# Altium PCB POEInjector.PcbDoc
Units mil, origin at the board's own origin, x right, y up, seen from the top; angles counter-clockwise.
Board outline 5250 x 2100 mil, 4 copper layers (Top Layer, GND Plane, 24V Plane, Bottom Layer), stack 30.634 mil thick; 59 components, 70 nets, 289 pads, 19 vias.
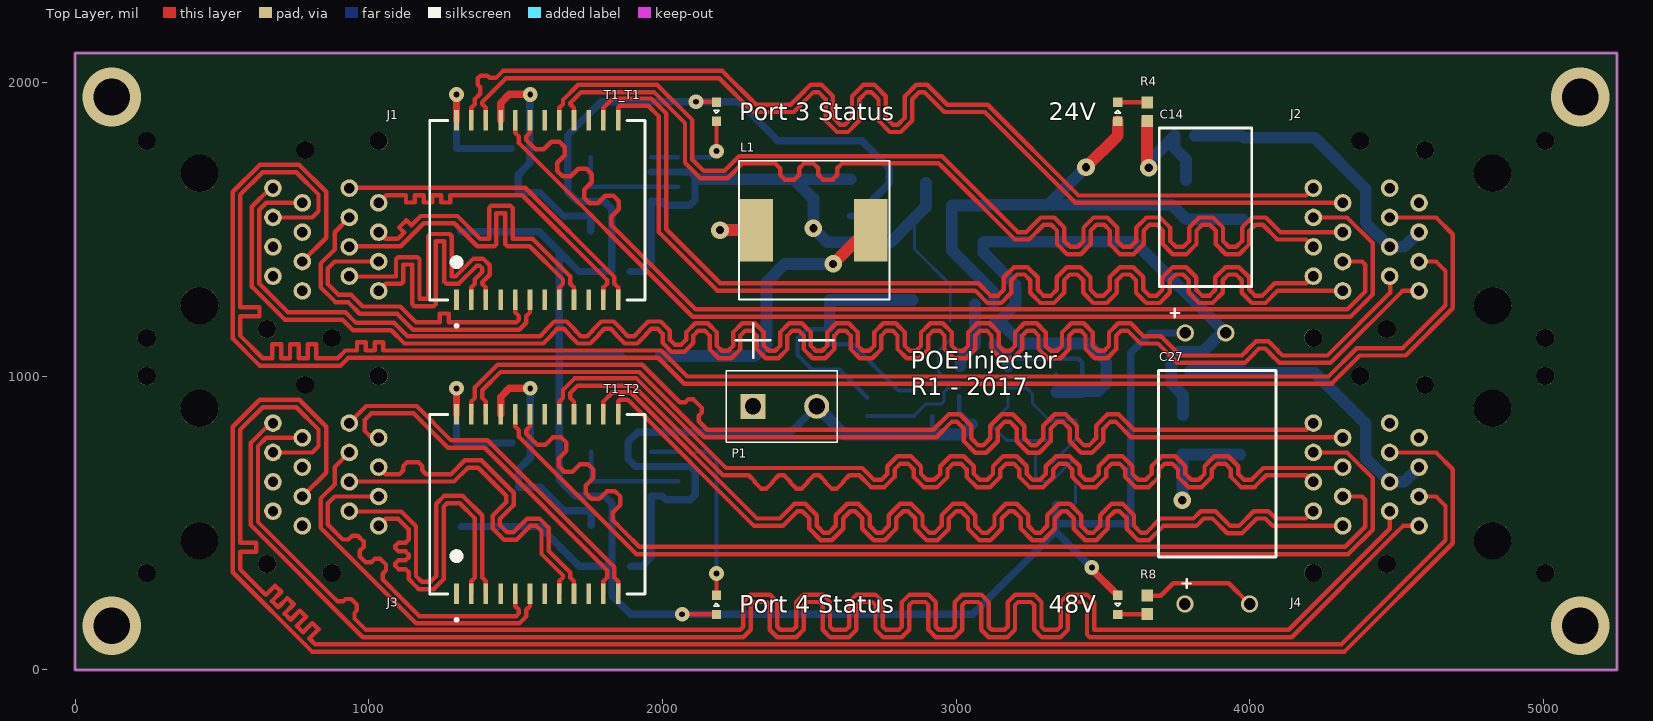
[diagram p0: Top Layer view]
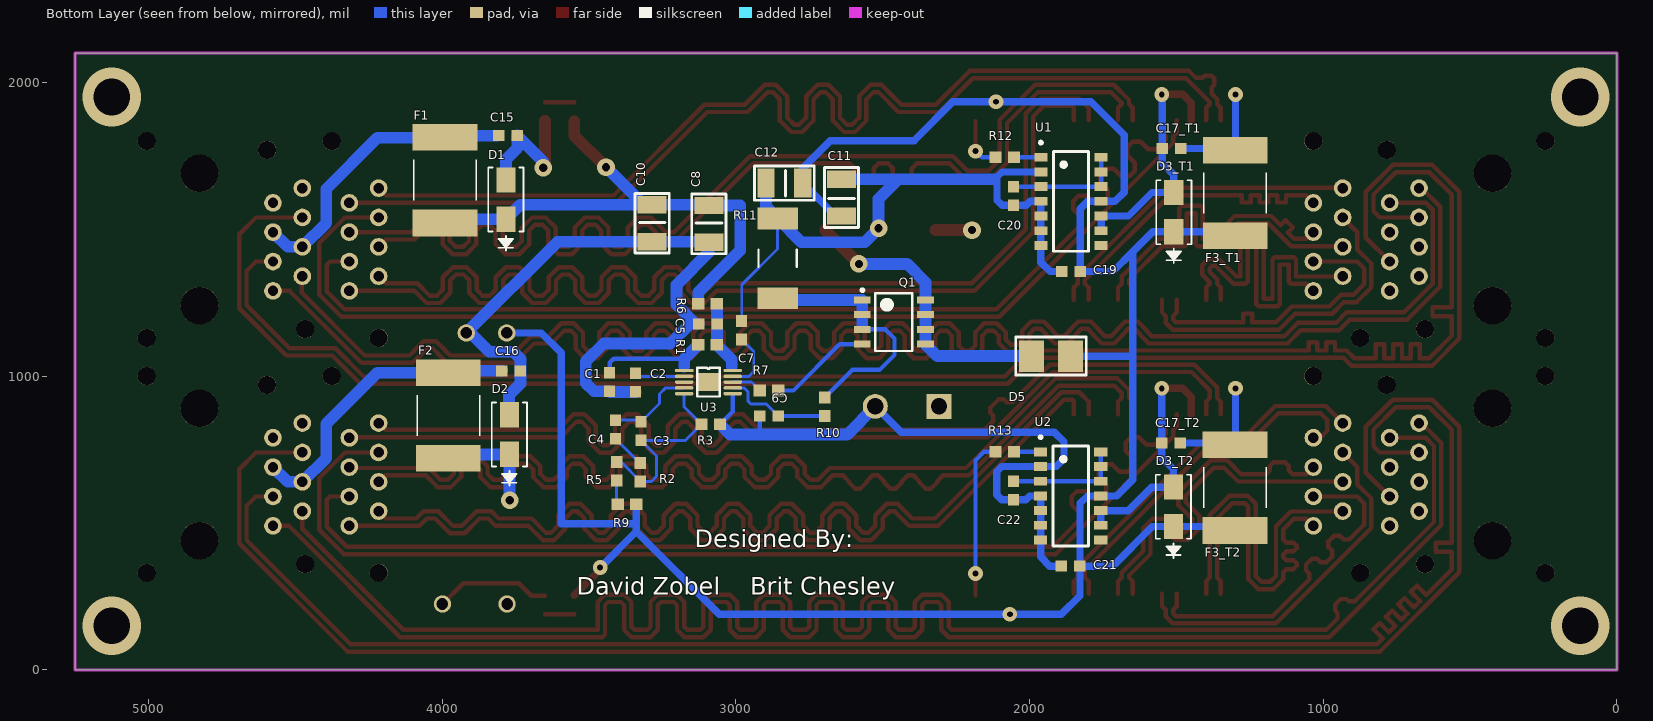
[diagram p1: Bottom Layer view, seen from below]
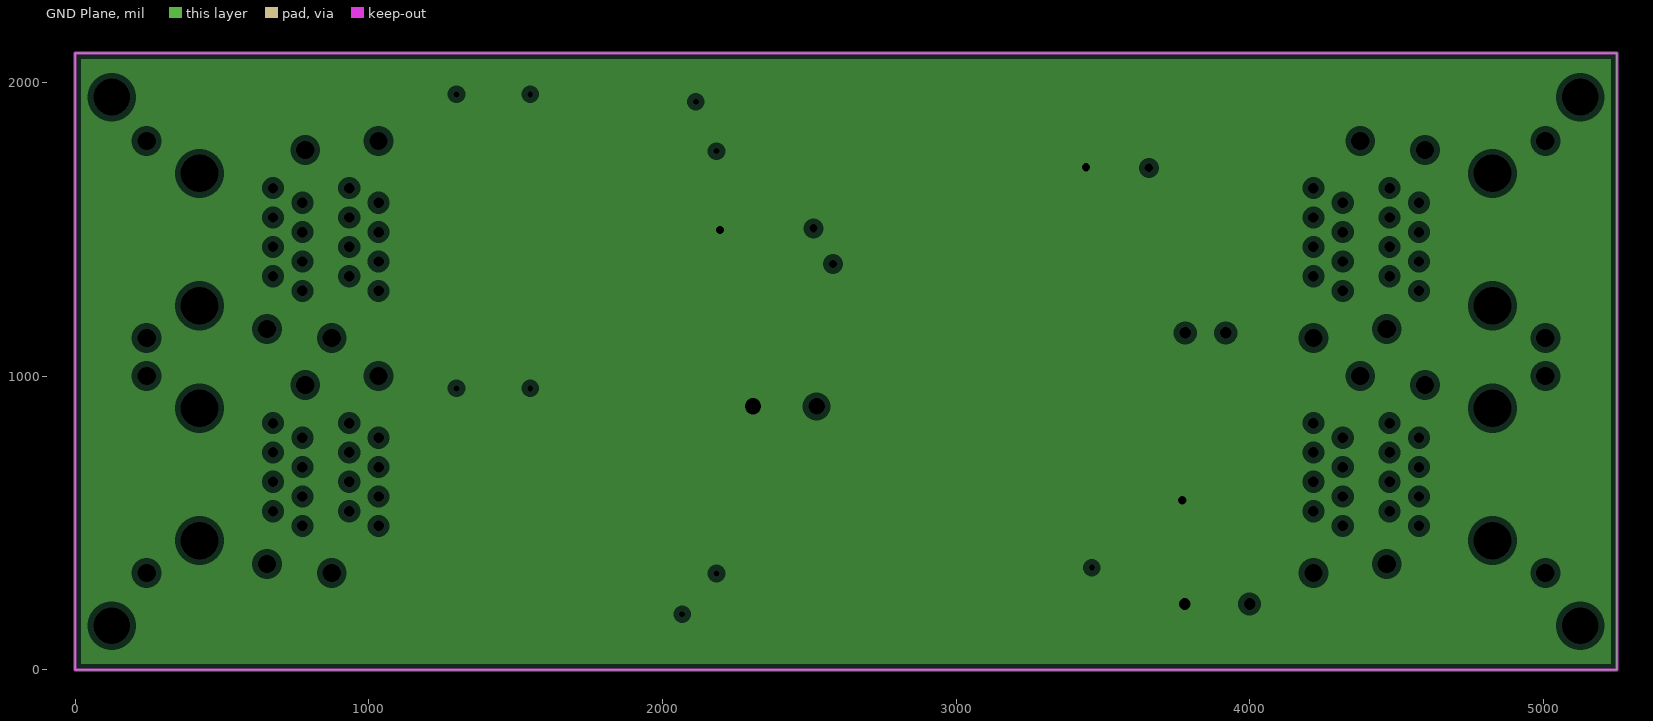
[diagram p2: GND Plane, clearances drawn from the general rule]
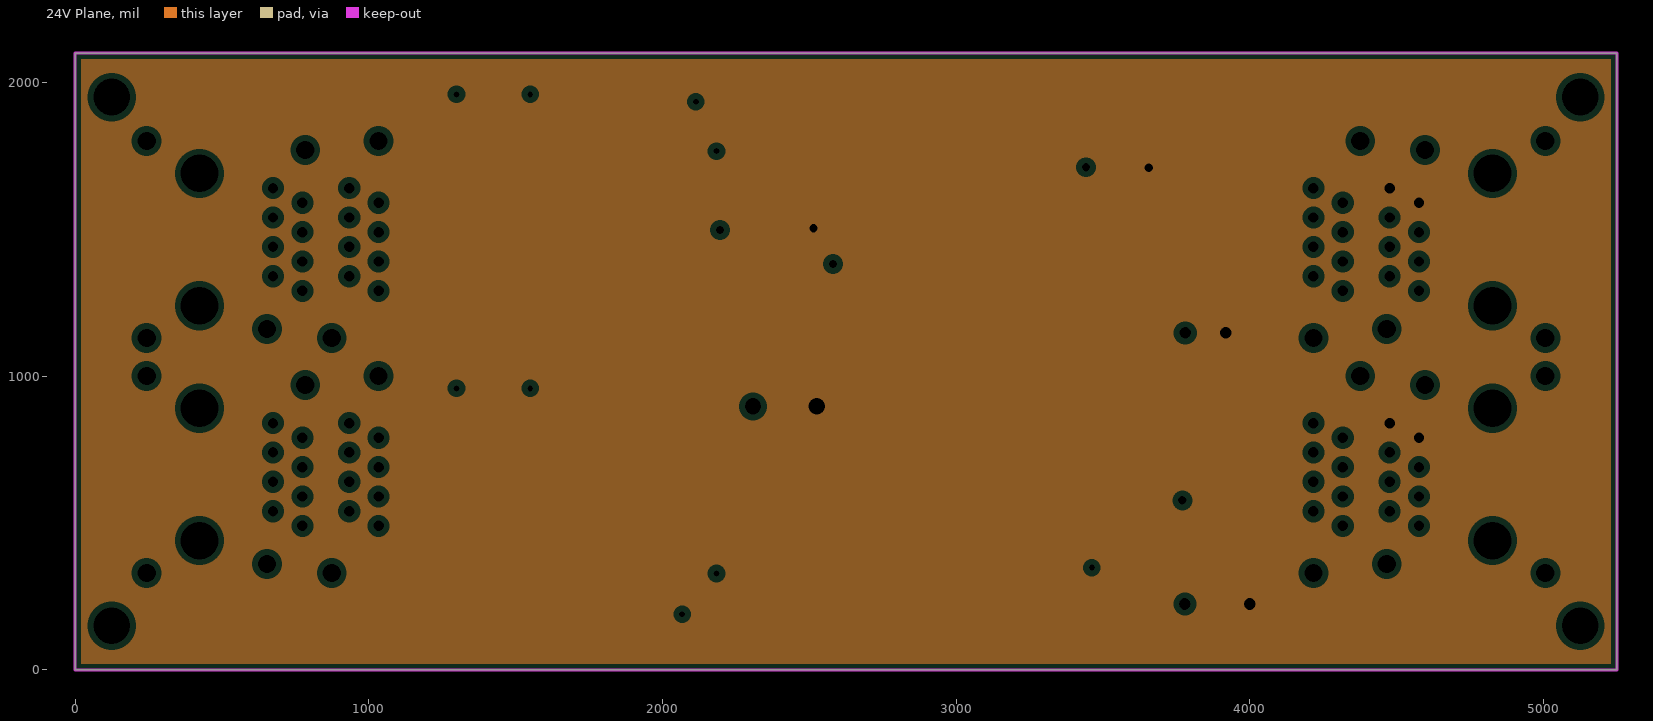
[diagram p3: 24V Plane, clearances drawn from the general rule]
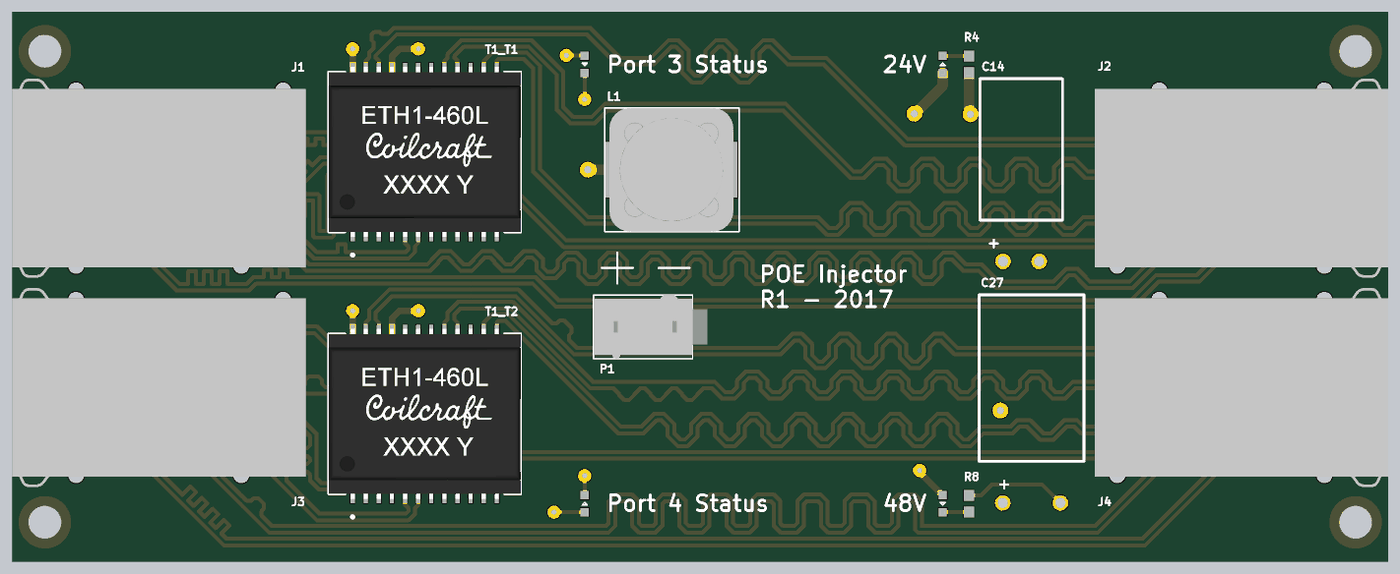
[diagram p4: 3D render of the assembled board from above, using the file's embedded part models]

## Layer stack, top to bottom
Top Solder: solder mask 0.4, Solder Resist, Dk 3.5
Top Layer: signal copper 1.4
Dielectric 1: core 10, FR-4, Dk 4.2
GND Plane: plane copper 1.417, net GND
Dielectric 3: prepreg 5, Dk 4.2
24V Plane: plane copper 1.417, net 24V
Dielectric 2: core 10, Dk 4.2
Bottom Layer: signal copper 1.4
Bottom Solder: solder mask 0.4, Solder Resist, Dk 3.5

## Board outline
0,0 5250,0 5250,2100 0,2100

## Design rules (kind name [scope] priority, off if disabled: settings)
Clearance [All] p1: gap=7 ignorepadtopadclearanceinfootprint=FALSE except(0: Arc-Hole Track-Hole SMDPad-Hole THPad-Hole Via-Hole Fill-Hole Poly-Hole Region-Hole Text-Hole)
DiffPairsRouting [All] p1: maxlimit=10 minlimit=10 mostfreqgap=10 toplayer_minwidth=15 toplayer_maxwidth=20 toplayer_prefwidth=15 bottomlayer_minwidth=15 bottomlayer_maxwidth=20 bottomlayer_prefwidth=15 maxuncoupledlength=500
PlaneClearance [All] p1: clearance=20
PlaneConnect [All] p1: planeconnectstyle=Relief reliefexpansion=25 reliefentries=4 reliefconductorwidth=15 reliefairgap=10
PolygonConnect [All] p1: connectstyle=Relief reliefconductorwidth=15 reliefentries=4 polygonreliefangle="90 Angle" airgapwidth=15
RoutingVias [All] p1: holewidth=20 width=50 viastyle="Through Hole" minholewidth=15 minwidth=50 maxholewidth=28 maxwidth=50
SolderMaskExpansion SolderMaskExpansion_1 [IsVia] p1: expansion=-250
SolderMaskExpansion [All] p2: expansion=4
Width [All] p1: maxlimit=50 minlimit=10 preferedwidth=15
27 further rules are at their usual default settings.

## Classes and differential pairs
channel class POEActiveTransformer: T1 T2
component class T2: C17_T2 D3_T2 F3_T2 T1_T2
component class T1: C17_T1 D3_T1 F3_T1 T1_T1
component class G1: C1 C2 C3 C4 C5 C7 C8 C9 C10 C11 C12 C13 C14 C27 D5 L1 Q1 R1 R2 R3 R5 R6 R7 R9 R10 R11 U3
component class POEInjectorTop: 24V 48V C15 C16 C19 C20 C21 C22 D1 D2 F1 F2 J1 J2 J3 J4 P1 "Port 3 Status" "Port 4 Status" R4 R8 R12 R13 U1 U2
differential pair O_OUT_T2: +O_OUT_T2_P -O_OUT_T2_N
differential pair O_OUT_T1: +O_OUT_T1_P -O_OUT_T1_N
differential pair O_IN_T2: +O_IN_T2_P -O_IN_T2_N
differential pair O_IN_T1: +O_IN_T1_P -O_IN_T1_N
differential pair G_OUT_T2: +G_OUT_T2_P -G_OUT_T2_N
differential pair G_OUT_T1: +G_OUT_T1_P -G_OUT_T1_N
differential pair G_IN_T2: +G_IN_T2_P -G_IN_T2_N
differential pair G_IN_T1: +G_IN_T1_P -G_IN_T1_N
differential pair BR_OUT_T2: +BR_OUT_T2_P -BR_OUT_T2_N
differential pair BR_OUT_T1: +BR_OUT_T1_P -BR_OUT_T1_N
differential pair BR_IN_T2: +BR_IN_T2_P -BR_IN_T2_N
differential pair BR_IN_T1: +BR_IN_T1_P -BR_IN_T1_N
differential pair B_OUT_T2: +B_OUT_T2_P -B_OUT_T2_N
differential pair B_OUT_T1: +B_OUT_T1_P -B_OUT_T1_N
differential pair B_IN_T2: +B_IN_T2_P -B_IN_T2_N
differential pair B_IN_T1: +B_IN_T1_P -B_IN_T1_N
differential pair G1: +G1_P -G1_N
differential pair G2: +G2_P -G2_N
differential pair O1: +O1_P -O1_N
differential pair O2: +O2_P -O2_N

## Components (designator, comment, footprint, x,y, rotation, side; value= is the part's Value field where it differs from the comment)
24V "LED" LED0603 3550,1900 r90 top
48V "LED" LED0603 3550,221 r270 top
C1 "Cap" CAPC0603 3430,979.5 r270 bottom
C2 "Cap" CAPC0603 3341,977.5 r270 bottom
C3 "Cap" CAPC0603 3323,812.5 r270 bottom
C4 "Cap" CAPC0603 3410,818.5 r270 bottom
C5 "Cap" CAPC0603 3095.5,1178 r0 bottom
C7 "Cap" CAPC0603 2980,1156 r90 bottom
C8 "CAP1210" CAP1210 3092,1581.79 r90 bottom
C9 "Cap" CAPC0603 2887,864 r0 bottom
C10 "CAP1210" CAP1210 3285,1583.79 r90 bottom
C11 "CAP1210" CAP1210 2640,1544.21 r270 bottom
C12 "CAP1210" CAP1210 2771.21,1657 r180 bottom
C14 "Cap Tant" 565-1720-ND 3849,1555 r90 top
C15 "Cap" CAPC0603 3776,1819 r180 bottom
C16 "Cap" CAPC0603 3765,1018 r180 bottom
C17_T1 "Cap" CAPC0603 1517,1775 r0 bottom (schematic designator C17)
C17_T2 "Cap" CAPC0603 1518,772 r0 bottom (schematic designator C17)
C19 "Cap" CAPC0603 1859,1356 r0 bottom (schematic designator C21)
C20 "Cap" CAPC0603 2054,1613 r270 bottom (schematic designator C22)
C21 "Cap" CAPC0603 1860,353 r0 bottom
C22 "Cap" CAPC0603 2055,610 r270 bottom
C27 "Cap Tant" ESY227M050AH2AA 3889,769 r90 top
D1 "Zener" SMASeries 3783,1601 r90 bottom
D2 "Zener" SMASeries 3771,801 r90 bottom
D3_T1 "Zener" SMASeries 1509,1558 r90 bottom (schematic designator D3)
D3_T2 "Zener" SMASeries 1510,555 r90 bottom (schematic designator D3)
D5 "Diode" MBRS360SMB 1927,1068 r180 bottom
F1 "PTC Fuse" PTC7451X11N 3990,1667 r90 bottom
F2 "PTC Fuse" PTC7451X11N 3979,866 r90 bottom
F3_T1 "PTC Fuse" PTC7451X11N 1300,1623 r270 bottom (schematic designator F3)
F3_T2 "PTC Fuse" PTC7451X11N 1301,620 r270 bottom (schematic designator F3)
J1 "RJ45 DUAL STACK" "RJ45 DUAL STACK" 424,1465 r270 top
J2 "RJ45 DUAL STACK" "RJ45 DUAL STACK" 4826,1465 r90 top
J3 "RJ45 DUAL STACK" "RJ45 DUAL STACK" 424,665 r270 top
J4 "RJ45 DUAL STACK" "RJ45 DUAL STACK" 4826,665 r90 top
L1 "37392C" 732-1247-1-ND 2320,1497 r90 top
P1 "MOLEX-MINIFITJR-HDR-1x2" MOLEX-MINIFITJR-HDR-1x2 2417,897 r90 top
"Port 3 Status" "LED" LED0603 2184,1900 r270 top
"Port 4 Status" "LED" LED0603 2184,221 r90 top
Q1 "SI4850EY" SOIC-8-NO-EP 2462,1184 r180 bottom
R1 "Res" RES0603 3096.5,1107 r0 bottom
R2 "Res" RES0603 3325,673 r270 bottom
R3 "Res" RES0603 3085.5,836 r180 bottom
R4 "Res" RES0603 3650,1900 r270 top
R5 "Res" RES0603 3406,676.5 r270 bottom
R6 "Res" RES0603 3096.5,1247 r180 bottom
R7 "Res" RES0603 2887,951 r0 bottom
R8 "Res" RES0603 3650,221 r90 top
R9 "Res" RES0603 3370.5,564 r180 bottom
R10 "Res" RES0603 2698,895 r270 bottom
R11 "Res" RES2512 2858,1400.83 r90 bottom
R12 "Res" RES0603 2084,1745 r0 bottom (schematic designator R13)
R13 "Res" RES0603 2085,742 r0 bottom
T1_T1 "ETH1-460" ETH1-460 1574,1565 r0 top (schematic designator T1)
T1_T2 "ETH1-460" ETH1-460 1574,564.21 r0 top (schematic designator T1)
U1 "LTC4263" LTC4263 1859,1595 r270 bottom (schematic designator U2)
U2 "LTC4263" LTC4263 1860,592 r270 bottom
U3 "TPS40210DGQ" TPS40210 3176,1019 r180 bottom

## Footprints (in the part's own frame and the unit in brackets; to place one, negate y for a bottom-side part, rotate by r counter-clockwise, add the part's x,y. Pads: shape width x height; smd on the part's side, far side on the other; paste and mask are expansions set on the pad)
565-1720-ND [mm] "CAP ALUM 56UF 20% 63V RADIAL 0.315\" diameter and 0.512\" height"
  round 1.5 hole 1: 1(-10.364,1.75) 2(-10.364,-1.75)
  silkscreen extent -9.01,-4 7.37,4, body extent -11.36,-4.06 7.37,3.81, height 8
732-1247-1-ND [mm] "FIXED IND 68UH 3.2A 89 MOHM SMD"
  rect 5.4x2.9 smd: 0(0,0) 1(0,-9.9)
  silkscreen extent -6,-11.5 6,1.5, body extent -6,-10.95 6,1.05, height 10.38
CAP1210 [mm]
  rect 1.5x2.5 smd: 1(-0.02,0) 2(-3.2,0)
  silkscreen extent -4.2,-1.48 0.97,1.48, body extent -3.22,-1.25 0,1.26, height 2.5
CAPC0603 [mm] "Chip Capacitor, 2-Leads, Body 1.60x0.80mm, IPC Medium Density"
  rect 1x0.95 smd: 1(-0.8,0) 2(0.8,0)
  body extent -0.88,-0.48 0.87,0.48, height 0.8
ESY227M050AH2AA [mm]
  round 1.5 hole 1: 1(-13.843,2.794) 2(-13.843,-2.794)
  silkscreen extent -12.44,-5.08 6.35,5.08, body extent -14.79,-4.95 6.35,5.08, height 8
ETH1-460 [mm] "\"PoE Plus\" Transformers Audio & Signal ETH1 60W 4pairs PoE+ Magnetic Module"
  rect 0.4x1.78 smd: 1(-6.985,-7.765) 2(-5.715,-7.765) 3(-4.445,-7.765) 4(-3.175,-7.765) 5(-1.905,-7.765) 6(-0.635,-7.765) 7(0.635,-7.765) 8(1.905,-7.765) 9(3.175,-7.765) 10(4.445,-7.765) 11(5.715,-7.765) 12(6.985,-7.765) 13(6.985,7.765) 14(5.715,7.765) 15(4.445,7.765) 16(3.175,7.765) 17(1.905,7.765) 18(0.635,7.765) 19(-0.635,7.765) 20(-1.905,7.765) 21(-3.175,7.765) 22(-4.445,7.765) 23(-5.715,7.765) 24(-6.985,7.765)
  silkscreen extent -9.3,-10.12 9.3,7.77, body extent -9.3,-8.25 9.3,8.25, height 10.16
LED0603 [mm] "Chip LED, 2-Leads, Body 1.60x0.80mm, IPC Medium Density"
  rect 0.8x0.8 smd: A(-0.825,0) C(0.825,0)
  silkscreen extent -0.13,-0.25 0.12,0.25, body extent -0.88,-0.48 0.87,0.47, height 0.8
LTC4263 [mil] "S Package 14-Lead Plastic SO Footprint"
  rect 30x45 smd: 1(-150,-102.5) 2(-100,-102.5) 3(-50,-102.5) 4(0,-102.5) 5(50,-102.5) 6(100,-102.5) 7(150,-102.5) 8(150,102.5) 9(100,102.5) 10(50,102.5) 11(0,102.5) 12(-50,102.5) 13(-100,102.5) 14(-150,102.5)
  silkscreen extent -205,-107 170,60, body extent -172,-122 172,122, height 69
MBRS360SMB [mil]
  rect 85x107.99 smd: A(-65.76,0) C(65.76,0)
  silkscreen extent -120,-65 120,65, body extent -105,-60 103,55, height 95
MOLEX-MINIFITJR-HDR-1x2 [mm] "MINIFITJRHDR VT DR O/PGS 2POS"
  rect 2.162x2.162 hole 1.4: 1(0,2.75)
  round 2.162 hole 1.4: 2(0,-2.75)
  silkscreen extent -3.1,-4.54 7.21,5.05, body extent -3.1,-5.96 3.1,5.04, height 12.8
PTC7451X11N [mm] "Chip PTC, 2920, 7351 metric 2-Leads, Body 7.36x5.12mm, IPC Medium Density"
  rect 2.3x5.6 smd: 1(-3.7,0) 2(3.7,0)
  silkscreen extent -1.75,-2.7 1.75,2.7, body extent -3.99,-2.72 3.99,2.72, height 1.15
RES0603 [mm] "Chip Resistor, 2-Leads, Body 1.60x0.80mm, IPC Medium Density"
  rect 1.05x1 smd: 1(-0.8,0) 2(0.8,0)
  body extent -0.88,-0.48 0.87,0.47, height 0.8
RES2512 [mm] "Chip Resistor, 2-Leads, Body 6.35x3.20mm, IPC Medium Density"
  rect 1.9x3.5 smd: 1(-3.45,0) 2(3.45,0)
  silkscreen extent -0.75,-1.65 0.75,1.65, body extent -3.22,-1.68 3.22,1.67, height 0.65
"RJ45 DUAL STACK" [mm] "RJ45, 8p8c, 2 port, double stacked connector"
  round 1.524 hole 0.9: 1(4.445,15.49) 2(3.175,12.95) 3(1.905,15.49) 4(0.635,12.95) 5(-0.635,15.49) 6(-1.905,12.95) 7(-3.175,15.49) 8(-4.445,12.95) 10(-3.175,8.89) 11(-1.905,6.35) 12(-0.635,8.89) 13(0.635,6.35) 14(1.905,8.89) 15(3.175,6.35) 16(4.445,8.89)
  round 1.524 hole 0.9 mask+0.102: 9(-4.445,6.35)
  round 1.57 hole 1.57 unplated: ""(-8.505,15.49) ""(-8.505,-4.57) ""(-7.745,9.14) ""(7.745,5.84) ""(8.505,11.43) ""(8.505,-4.57)
  round 3.25 hole 3.25 unplated: ""(-5.715,0) ""(5.715,0)
  body extent -9.65,-10.77 9.65,17.68, height 25.29
SMASeries [mil]
  rect 86x65 smd: A(67,0) C(-67,0)
  silkscreen extent -174,-60 109,60, body extent -104,-55 104,55, height 92
SOIC-8-NO-EP [mm] "SOIC, 8-Leads, Body 4.90x3.90mm, Pitch 1.27mm, IPC Medium Density"
  rect 1.45x0.6 smd: 1(-2.725,1.905) 2(-2.725,0.635) 3(-2.725,-0.635) 4(-2.725,-1.905) 5(2.725,-1.905) 6(2.725,-0.635) 7(2.725,0.635) 8(2.725,1.905)
  silkscreen extent -2.85,-2.5 1.6,2.88, body extent -2,-2.5 2,2.5, height 1.75
TPS40210 [mm]
  rect 1.6x0.3 smd: 1(0,0)
  oval 1.6x0.3 smd: 2(0,-0.5) 3(0,-1) 4(0,-1.5) 5(0,-2) 6(4.2,-2) 7(4.2,-1.5) 8(4.2,-1) 9(4.2,-0.5) 10(4.2,0)
  rect 1.88x1.57 smd: 11(2.108,-0.991)
  silkscreen extent 1.14,-2.25 3.07,0.25, body extent -0.36,-2.52 4.56,0.48, height 1.2

## Part data
C8 C10 C11 C12: "CAP CER 10UF 50V 20% X5R 1210"
C14: library part CapPol, "100 uF CAP ALUM 20% 63V RADIAL"
C27: library part CapPol, "CAP ALUM 220UF"
D1 D2 D3_T1 D3_T2: "Zener Diode"
D5: "Standard Diode Template"
F1 F2 F3_T1 F3_T2: library part PTC_Fuse
J1 J2 J3 J4: "CONN MOD JACK 8P8C R/A SHIELDED"
L1: "INDUCTOR 3.90UH 10.0A SMD"
P1: "MINIFITJRHDR VT DR O/PGS 2POS"
Q1: "MOSFET N-CH 60V 6A 8-SOIC"
T1_T1 T1_T2: "\"PoE Plus\" Transformers Audio & Signal ETH1 60W 4pairs PoE+ Magnetic Module"
U1 U2: "IC POE 803.2AF SINGL PSE 14-SOIC"

## Via types
v1: diameter 50, hole 20, Top Layer to Bottom Layer, 9 vias
v2: diameter 60, hole 28, Top Layer to Bottom Layer, 6 vias
v3: diameter 200, hole 125, Top Layer to Bottom Layer, 4 vias

## Nets (pads, with @x,y where several pads share a name; then routed paths per layer and width w, separated by ;. In a path a pad name is that pad's centre, name@x,y a point inside that pad or via, vN(x,y) a via of type N, cw(c..) or ccw(c..) an arc to the next point about the centre after c; other vN are vias at no path point)
24V: 24V.A C8.1 C10.1 C27.1 D1.C D2.C F1.1 F2.1 L1.0 P1.1 R6.1 | length 2271.8
  Top Layer w40: v2(2196,1497) L1.0 ; v2(3442,1711) 3550,1819 24V.A
  Bottom Layer w40: R6.1 3128,1285 2985,1428 2985,1581 C8.1 3094,1583 C10.1 C10.1@3314,1583 ; v2(3442,1711) C10.1@3314,1583 ; v2(3770,577) 3771,578 D2.C ; D2.C@3772,733 F2.1@3966.33,733 ; C27.1@3774,229 C27.1 ; F1.1@3977.33,1534 D1.C 3734,1583 C10.1@3314,1583
48V: 48V.A "Port 3 Status.A" "Port 4 Status.A" C11.1 C12.1 C14.1 C19.1 C21.1 D3_T1.C D3_T2.C D5.C F3_T1.2 F3_T2.2 R9.2 U1.11 U2.11 | length 7989
  Top Layer w15: v1(2067,189) 2183.52,189 ; v1(2114,1934) 2182.48,1934
  Top Layer w25: v1(3462,348) 3462,341.48 48V.A
  Bottom Layer w25: F3_T1.2@1313.67,1491 D3_T1.C 1581,1491 1648.5,1423.5 ; F3_T2.2@1314.67,488 D3_T2.C 1582,488 1717,353 C21.1 ; D5.C 1648.5,1068 ; 2393,1801 2679,1801 2772,1708 C12.1 2660,1545 C11.1 ; 2393,1802 2261,1934 v1(2114,1934) 1791,1934 1678,1821 1678,1626 1709,1595 U1.11 1802,1595 1827.5,1569.5 C19.1 1716,1356 1648.5,1423.5 ; R9.2 3339.01,497 ; v1(3462,348) 3339.01,470.99 ; C14.1 3662.97,1146.97 3595,1079 3595,497 3339.01,497 ; 1648.5,1068 1648.5,646.5 1703,592 U2.11 1803,592 1828.5,566.5 C21.1 ; 1648.5,1068 1648.5,1423.5 ; C21.1 1828.5,252.5 1892,189 3057.02,189 3339.01,470.99 ; 3339.01,470.99 3339.01,497
B_IN_T1_N: J1.5 T1_T1.9 | length 1130.9
  Top Layer w15: J1.5 1056.84,1467 1099,1467 1108.5,1476.5 1120.87,1488.87 1103.51,1506.24 1128.26,1530.99 1145.62,1513.62 1164,1532 1177,1545 1302,1545 1380,1467 1409.82,1467 1409.82,1572.41 1417.14,1579.73 1482.5,1579.73 1489.82,1572.41 1489.82,1467 1558.86,1467 1686.5,1339.36 1686.5,1314.33 1699,1301.83 T1_T1.9
B_IN_T1_P: J1.4 T1_T1.8 | length 1131.7
  Top Layer w15: J1.4 935.84,1442 1056.84,1442 1109.36,1442 1187.36,1520 1291.64,1520 1369.64,1442 1427.5,1442 1434.82,1449.32 1434.82,1554.73 1464.82,1554.73 1464.82,1449.32 1472.14,1442 1548.5,1442 1661.5,1329 1661.5,1314.33 1649,1301.83 T1_T1.8
B_IN_T2_N: J3.5 T1_T2.9 | length 1183.5
  Top Layer w15: J3.5 1057.84,666 1085,666 1104.5,666 1117.5,679 1117.5,693.5 1130.5,706.5 1169.5,706.5 1182.5,693.5 1182.5,679 1195.5,666 1247.5,666 1280,666 1327.32,713.32 1383.02,713.32 1454.24,642.1 1493.38,602.96 1493.38,560.79 1446.71,514.12 1446.71,492.65 1471.21,468.16 1492.68,468.16 1539.34,514.82 1581.52,514.82 1613.24,483.11 1613.24,404.62 1686.5,331.36 1686.5,314.33 1699,301.83 T1_T2.9@1699,259.29
B_IN_T2_P: J3.4 T1_T2.8 | length 1182
  Top Layer w15: J3.4 934.84,641 1290.36,641 1337.68,688.32 1372.67,688.32 1468.38,592.61 1468.38,571.14 1421.71,524.47 1421.71,482.3 1460.86,443.16 1503.03,443.16 1549.7,489.82 1571.16,489.82 1588.24,472.75 1588.24,394.26 1661.5,321 1661.5,314.33 1649,301.83 T1_T2.8@1649,259.29
B_OUT_T1_N: J2.5 T1_T1.16 | length 3680.4
  Top Layer w15: T1_T1.16 1699,1913.25 1686.5,1925.75 1686.5,1930 1723.5,1967 1971.47,1967 2077,1861.47 2077,1726.64 2129.64,1674 2222,1674 2272,1724 2303,1724 2335.5,1724 2384.25,1724 2400.5,1707.75 2400.5,1685.25 2416.75,1669 2449.25,1669 2465.5,1685.25 2465.5,1707.75 2481.75,1724 2514.25,1724 2530.5,1707.75 2530.5,1685.25 2546.75,1669 2579.25,1669 2595.5,1685.25 2595.5,1707.75 2611.75,1724 2646,1724 2941,1724 2947.5,1717.5 3200,1465 3248.18,1465 3298.18,1515 3323.82,1515 3343.5,1495.32 3343.5,1449.32 3377.82,1415 3424.18,1415 3458.5,1449.32 3458.5,1495.32 3478.18,1515 3503.82,1515 3523.5,1495.32 3523.5,1449.32 3557.82,1415 3604.18,1415 3638.5,1449.32 3638.5,1495.32 3658.18,1515 3683.82,1515 3703.5,1495.32 3703.5,1449.32 3737.82,1415 3784.18,1415 3818.5,1449.32 3818.5,1495.32 3838.18,1515 3863.82,1515 3883.5,1495.32 3883.5,1449.32 3917.82,1415 3964.18,1415 3998.5,1449.32 3998.5,1495.32 4018.18,1515 4043.82,1515 4093.82,1465 4191.16,1465 J2.5
B_OUT_T1_P: J2.4 T1_T1.17 | length 3667.6
  Top Layer w15: T1_T1.17 1649,1913.25 1661.5,1925.75 1661.5,1940.36 1713.14,1992 1981.82,1992 2102,1871.82 2102,1737 2140,1699 2211.64,1699 2261.64,1749 2916.36,1749 2951.36,1749 3210.36,1490 3237.82,1490 3287.82,1540 3334.18,1540 3368.5,1505.68 3368.5,1459.68 3388.18,1440 3413.82,1440 3433.5,1459.68 3433.5,1505.68 3467.82,1540 3514.18,1540 3548.5,1505.68 3548.5,1459.68 3568.18,1440 3593.82,1440 3613.5,1459.68 3613.5,1505.68 3647.82,1540 3694.18,1540 3728.5,1505.68 3728.5,1459.68 3748.18,1440 3773.82,1440 3793.5,1459.68 3793.5,1505.68 3827.82,1540 3874.18,1540 3908.5,1505.68 3908.5,1459.68 3928.18,1440 3953.82,1440 3973.5,1459.68 3973.5,1505.68 4007.82,1540 4054.18,1540 4104.18,1490 J2.4
B_OUT_T2_N: J4.5 T1_T2.16 | length 3584.9
  Top Layer w15: T1_T2.16@1699,870.71 1699,913.25 1686.5,925.75 1686.5,942.5 1711,967 1901.18,967 2206.18,662 2225,662 2255,662 2294,662 2315,641 2315,638 2336,617 2354,617 2375,638 2375,641 2396,662 2414,662 2435,641 2435,638 2456,617 2474,617 2495,638 2495,641 2516,662 2534,662 2555,641 2555,638 2576,617 2594,617 2615,638 2615,641 2636,662 2653,662 2669.82,662 2709.82,622 2756.18,622 2790.5,656.32 2790.5,682.32 2810.18,702 2835.82,702 2855.5,682.32 2855.5,656.32 2889.82,622 2936.18,622 2970.5,656.32 2970.5,682.32 2990.18,702 3015.82,702 3035.5,682.32 3035.5,656.32 3069.82,622 3116.18,622 3150.5,656.32 3150.5,682.32 3170.18,702 3195.82,702 3215.5,682.32 3215.5,656.32 3249.82,622 3296.18,622 3330.5,656.32 3330.5,682.32 3350.18,702 3375.82,702 3395.5,682.32 3395.5,656.32 3429.82,622 3476.18,622 3510.5,656.32 3510.5,682.32 3530.18,702 3555.82,702 3575.5,682.32 3575.5,656.32 3609.82,622 3656.18,622 3690.5,656.32 3690.5,682.32 3710.18,702 3735.82,702 3755.5,682.32 3755.5,656.32 3789.82,622 3836.18,622 3870.5,656.32 3870.5,682.32 3890.18,702 3915.82,702 3935.5,682.32 3935.5,656.32 3969.82,622 4016.18,622 4056.18,662 4194.16,662 J4.5
B_OUT_T2_P: J4.4 T1_T2.17 | length 3596.1
  Top Layer w15: T1_T2.17@1649,870.71 1649,913.25 1661.5,925.75 1661.5,952.86 1700.64,992 1911.53,992 2216.53,687 2680.18,687 2720.18,647 2745.82,647 2765.5,666.68 2765.5,692.68 2799.82,727 2846.18,727 2880.5,692.68 2880.5,666.68 2900.18,647 2925.82,647 2945.5,666.68 2945.5,692.68 2979.82,727 3026.18,727 3060.5,692.68 3060.5,666.68 3080.18,647 3105.82,647 3125.5,666.68 3125.5,692.68 3159.82,727 3206.18,727 3240.5,692.68 3240.5,666.68 3260.18,647 3285.82,647 3305.5,666.68 3305.5,692.68 3339.82,727 3386.18,727 3420.5,692.68 3420.5,666.68 3440.18,647 3465.82,647 3485.5,666.68 3485.5,692.68 3519.82,727 3566.18,727 3600.5,692.68 3600.5,666.68 3620.18,647 3645.82,647 3665.5,666.68 3665.5,692.68 3699.82,727 3746.18,727 3780.5,692.68 3780.5,666.68 3800.18,647 3825.82,647 3845.5,666.68 3845.5,692.68 3879.82,727 3926.18,727 3960.5,692.68 3960.5,666.68 3980.18,647 4005.82,647 4045.82,687 4194.16,687 4313.16,687 J4.4
BR_IN_T1_N: J1.8 T1_T1.12 | length 1111.7
  Top Layer w15: J1.8@933.84,1641 1532.86,1641 1836.5,1337.36 1836.5,1314.33 1849,1301.83 T1_T1.12
BR_IN_T1_P: J1.7 T1_T1.11 | length 1130.9
  Top Layer w15: J1.7 1059.84,1616 1082,1616 1097,1616 1127,1616 1127,1591.02 1157,1591.02 1157,1616 1187,1616 1187,1591.02 1217,1591.02 1217,1616 1247,1616 1247,1591.02 1277,1591.02 1277,1616 1306,1616 1522.5,1616 1811.5,1327 1811.5,1314.33 1799,1301.83 T1_T1.11
BR_IN_T2_N: J3.8 T1_T2.12 | length 1249.3
  Top Layer w15: J3.8 991.84,898 1163.36,898 1280.36,781 1405,781 1836.5,349.5 1836.5,314.33 1849,301.83 T1_T2.12@1849,259.29
BR_IN_T2_P: J3.7 T1_T2.11 | length 1234.1
  Top Layer w15: J3.7 1010,790 987,813 987,851 1009,873 1153,873 1270,756 1394.64,756 1811.5,339.14 1811.5,314.33 1799,301.83 T1_T2.11@1799,259.29
BR_OUT_T1_N: J2.8 T1_T1.13 | length 3693.4
  Top Layer w15: T1_T1.13 1849,1914 1855,1920 1952,1920 1988,1884 1988,1489.64 2186.64,1291 3064.82,1291 3106.82,1249 3153.18,1249 3187.5,1283.32 3187.5,1326.32 3207.18,1346 3232.82,1346 3252.5,1326.32 3252.5,1283.32 3286.82,1249 3333.18,1249 3367.5,1283.32 3367.5,1326.32 3387.18,1346 3412.82,1346 3432.5,1326.32 3432.5,1283.32 3466.82,1249 3513.18,1249 3547.5,1283.32 3547.5,1326.32 3567.18,1346 3592.82,1346 3612.5,1326.32 3612.5,1283.32 3646.82,1249 3693.18,1249 3727.5,1283.32 3727.5,1326.32 3747.18,1346 3772.82,1346 3792.5,1326.32 3792.5,1283.32 3826.82,1249 3873.18,1249 3907.5,1283.32 3907.5,1326.32 3927.18,1346 3952.82,1346 3972.5,1326.32 3972.5,1283.32 4006.82,1249 4053.18,1249 4095.18,1291 4192.16,1291 4315.16,1291 J2.8
BR_OUT_T1_P: J2.7 T1_T1.14 | length 3662.8
  Top Layer w15: T1_T1.14 1799,1913.25 1830.75,1945 1855,1945 1962.36,1945 2013,1894.36 2013,1500 2197,1316 3075.18,1316 3117.18,1274 3142.82,1274 3162.5,1293.68 3162.5,1336.68 3196.82,1371 3243.18,1371 3277.5,1336.68 3277.5,1293.68 3297.18,1274 3322.82,1274 3342.5,1293.68 3342.5,1336.68 3376.82,1371 3423.18,1371 3457.5,1336.68 3457.5,1293.68 3477.18,1274 3502.82,1274 3522.5,1293.68 3522.5,1336.68 3556.82,1371 3603.18,1371 3637.5,1336.68 3637.5,1293.68 3657.18,1274 3682.82,1274 3702.5,1293.68 3702.5,1336.68 3736.82,1371 3783.18,1371 3817.5,1336.68 3817.5,1293.68 3837.18,1274 3862.82,1274 3882.5,1293.68 3882.5,1336.68 3916.82,1371 3963.18,1371 3997.5,1336.68 3997.5,1293.68 4017.18,1274 4042.82,1274 4084.82,1316 4192.16,1316 J2.7
BR_OUT_T2_N: J4.8 T1_T2.13 | length 3601.4
  Top Layer w15: T1_T2.13@1849,870.71 1849,914 1855,920 1881.71,920 2311.71,490 2409.68,490 2459.68,540 2476.32,540 2500.5,515.82 2500.5,479.82 2539.32,441 2576.68,441 2615.5,479.82 2615.5,515.82 2639.68,540 2656.32,540 2680.5,515.82 2680.5,479.82 2719.32,441 2756.68,441 2795.5,479.82 2795.5,515.82 2819.68,540 2836.32,540 2860.5,515.82 2860.5,479.82 2899.32,441 2936.68,441 2975.5,479.82 2975.5,515.82 2999.68,540 3016.32,540 3040.5,515.82 3040.5,479.82 3079.32,441 3116.68,441 3155.5,479.82 3155.5,515.82 3179.68,540 3196.32,540 3220.5,515.82 3220.5,479.82 3259.32,441 3296.68,441 3335.5,479.82 3335.5,515.82 3359.68,540 3376.32,540 3400.5,515.82 3400.5,479.82 3439.32,441 3476.68,441 3515.5,479.82 3515.5,515.82 3539.68,540 3556.32,540 3580.5,515.82 3580.5,479.82 3619.32,441 3656.68,441 3705.68,490 3818.18,490 3843.18,515 3872.82,515 3922.82,465 3973.18,465 4023.18,515 4052.82,515 4077.82,490 4191.16,490 J4.8
BR_OUT_T2_P: J4.7 T1_T2.14 | length 3571.7
  Top Layer w15: T1_T2.14@1799,870.71 1799,913.25 1830.75,945 1855,945 1892.06,945 2322.06,515 2399.32,515 2449.32,565 2486.68,565 2525.5,526.18 2525.5,490.18 2549.68,466 2566.32,466 2590.5,490.18 2590.5,526.18 2629.32,565 2666.68,565 2705.5,526.18 2705.5,490.18 2729.68,466 2746.32,466 2770.5,490.18 2770.5,526.18 2809.32,565 2846.68,565 2885.5,526.18 2885.5,490.18 2909.68,466 2926.32,466 2950.5,490.18 2950.5,526.18 2989.32,565 3026.68,565 3065.5,526.18 3065.5,490.18 3089.68,466 3106.32,466 3130.5,490.18 3130.5,526.18 3169.32,565 3206.68,565 3245.5,526.18 3245.5,490.18 3269.68,466 3286.32,466 3310.5,490.18 3310.5,526.18 3349.32,565 3386.68,565 3425.5,526.18 3425.5,490.18 3449.68,466 3466.32,466 3490.5,490.18 3490.5,526.18 3529.32,565 3566.68,565 3605.5,526.18 3605.5,490.18 3629.68,466 3646.32,466 3695.32,515 3807.82,515 3832.82,540 3883.18,540 3933.18,490 3962.82,490 4012.82,540 4063.18,540 4088.18,515 4191.16,515 J4.7
G1_N: J1.14 J2.14 | length 6001.5
  Top Layer w15: J1.14 855,1471 855,1627.36 763.36,1719 628.64,1719 537,1627.36 537,1127.64 621.64,1043 628.97,1035.68 904.68,1035.68 931,1062 1985.64,1062 2073.97,973.68 4278.03,973.68 4374.36,1070 4530.36,1070 4691,1230.64 4691,1483 4634,1540 J2.14
G1_P: J1.11 J2.11 | length 6069.7
  Top Layer w15: J1.11 808,1540 829,1561 829,1618 753,1694 639,1694 562,1617 562,1294 562,1264 562,1234 628.19,1234 628.19,1204 562,1204 562,1174 562,1159 562,1138 639.32,1060.68 657,1060.68 672,1060.68 672,1109 702,1109 702,1060.68 732,1060.68 732,1109 762,1109 762,1060.68 792,1060.68 792,1109 822,1109 822,1060.68 852,1060.68 877,1060.68 894.32,1060.68 920.64,1087 945,1087 960,1087 960,1115.29 990,1115.29 990,1087 1020,1087 1020,1115.29 1050,1115.29 1050,1087 1056,1087 1996,1087 2084.32,998.68 4267.68,998.68 4364,1095 4520,1095 4666,1241 4666,1358 4634,1390 J2.11
G2_N: J3.14 J4.14 | length 6069.7
  Top Layer w15: J3.14 855,671 855,827.36 763.36,919 628.64,919 537,827.36 537,332 807,62 4322.36,62 4691,430.64 4691,683 4634,740 J4.14
G2_P: J3.11 J4.11 | length 6069.7
  Top Layer w15: J3.11 808,740 829,761 829,818 753,894 639,894 562,817 562,447 562,432 617.5,432 617.5,402 562,402 562,372 562,364 562,342.36 638.68,265.68 649.28,255.07 680.78,286.56 701.99,265.35 670.5,233.86 691.71,212.64 723.2,244.14 744.42,222.92 712.92,191.43 734.14,170.22 765.63,201.71 786.84,180.5 755.35,149.01 776.56,127.79 808.06,159.29 829.27,138.07 797.78,106.58 804.18,100.18 817.36,87 4312,87 4666,441 4666,558 4634,590 J4.11
G_IN_T1_N: J1.6 T1_T1.6 | length 1130.9
  Top Layer w15: J1.6 884,1490.16 884,1431 836,1383 836,1302.64 886.64,1252 929.64,1252 969.64,1212 1096.64,1212 1150.64,1158 1512.86,1158 1536.5,1181.64 1536.5,1204.25 1549,1216.75 T1_T1.6
G_IN_T1_P: J1.3 T1_T1.5 | length 1076.9
  Top Layer w15: J1.3 884,1390 861,1367 861,1313 897,1277 940,1277 980,1237 1107,1237 1161,1183 1167,1183 1182,1183 1212,1183 1242,1183 1242,1213 1272,1213 1272,1183 1301,1183 1502.5,1183 1511.5,1192 1511.5,1204.25 1499,1216.75 T1_T1.5
G_IN_T2_N: J3.6 T1_T2.6 | length 1224.9
  Top Layer w15: J3.6 884,690.16 884,631 836,583 836,483.64 1161.64,158 1512.86,158 1536.5,181.64 1536.5,204.25 1549,216.75 T1_T2.6 T1_T2.6@1549,259.29
G_IN_T2_P: J3.3 T1_T2.5 | length 1225.7
  Top Layer w15: J3.3 884,590 861,567 861,494 901.5,453.5 911.22,443.78 930.67,443.78 943.57,456.67 963.01,456.67 982.46,437.23 982.46,417.78 969.56,404.89 969.56,385.44 989,366 1008.45,366 1020.03,377.57 1039.47,377.57 1058.92,358.13 1058.92,338.68 1047.34,327.1 1047.34,307.66 1092,263 1172,183 1502.5,183 1511.5,192 1511.5,204.25 1499,216.75 T1_T2.5 T1_T2.5@1499,259.29
G_OUT_T1_N: J2.6 T1_T1.19 | length 3678.4
  Top Layer w15: T1_T1.19 1549,1828.17 1536.5,1815.67 1536.5,1804 1559.4,1781.1 1568.59,1771.91 1596.17,1771.91 1621.67,1797.41 1649.24,1797.41 1667.63,1779.03 1667.63,1751.45 1642.13,1725.95 1642.13,1698.37 1660.51,1679.99 1688.09,1679.99 1713.59,1705.49 1741.17,1705.49 1759.55,1687.11 1759.55,1659.53 1734.05,1634.03 1734.05,1606.45 1752.44,1588.06 1780.01,1588.06 1805.52,1613.57 1833.09,1613.57 1851.48,1595.18 1851.48,1567.61 1825.97,1542.1 1825.97,1514.53 1884.75,1455.75 2113.5,1227 4332,1227 4393,1288 4393,1379 4382,1390 J2.6
G_OUT_T1_P: J2.3 T1_T1.20 | length 3678.4
  Top Layer w15: T1_T1.20 1499,1828.17 1511.5,1815.67 1511.5,1793.64 2103.14,1202 4342.36,1202 4356.36,1216 4418,1277.64 4418,1453 4331,1540 J2.3
G_OUT_T2_N: J4.6 T1_T2.19 | length 3603.5
  Top Layer w15: T1_T2.19@1549,870.71 T1_T2.19 1549,828.17 1536.5,815.67 1536.5,804 1564.75,775.75 1573.94,766.56 1601.52,766.56 1627.11,792.15 1654.69,792.15 1673.08,773.77 1673.08,746.19 1647.48,720.6 1647.48,693.02 1665.87,674.63 1693.44,674.63 1719.04,700.23 1746.62,700.23 1765,681.84 1765,654.27 1739.41,628.67 1739.41,601.09 1757.79,582.71 1785.37,582.71 1810.96,608.31 1838.54,608.31 1856.92,589.92 1856.92,562.34 1831.33,536.75 1831.33,509.17 1871.25,469.25 1921.5,419 4325,419 4393,487 4393,579 4382,590 J4.6
G_OUT_T2_P: J4.3 T1_T2.20 | length 3602.7
  Top Layer w15: T1_T2.20@1499,870.71 T1_T2.20 1499,828.17 1511.5,815.67 1511.5,793.64 1629.8,675.34 1648.19,656.96 1721.73,583.42 1740.11,565.03 1813.65,491.49 1853.57,451.57 1911.14,394 4335.36,394 4418,476.64 4418,579 4418,653 4331,740 J4.3
GND: C1.2 C2.2 C5.2 C7.2 C8.2 C9.2 C10.2 C11.2 C12.2 C14.2 C15.2 C16.2 C19.2 C20.2 C21.2 C22.2 C27.2 D1.A D2.A J2.15 J2.16 J4.15 J4.16 P1.2 R3.2 R4.2 R8.2 R11.2 U1.2 U1.4 U1.5 U1.6 U1.7 U2.2 U2.4 U2.5 U2.6 U2.7 U3.6 | length 7929.2
  Top Layer w15: R8.2 3696.5,252.5 3739,295 3928,295 C27.2
  Top Layer w40: R4.2 3650,1715 v2(3656,1709)
  Bottom Layer w10: R11.2 2858,1433 2980,1311 C7.2
  Bottom Layer w15: 2918.5,803.5 C9.2 ; 3010.65,931.35 3010.65,879.36 R3.2
  Bottom Layer w25: C19.2 1930,1356 1961.5,1387.5 U1.7 U1.6 U1.5 U1.4 1998,1595 2011.5,1581.5 C20.2 2093.5,1581.5 2111,1599 2111,1678 ; C21.2 1931,353 1962.5,384.5 U2.7 U2.6 U2.5 U2.4 1999,592 2012.5,578.5 C22.2 2094.5,578.5 2112,596 2112,675 2095,692 U2.2 1909,692 1883,718 1883,776 1916,809 2437.27,809 P1.2 ; U1.2 2094,1695 2111,1678 ; 2118.8,1670.2 2111,1678
  Bottom Layer w40: 2118.8,1670.2 C11.2 ; 2450.5,1667.5 2514,1604 v2(2514,1503) 2561,1456 2777.35,1456 R11.2 2897.2,1575.85 C12.2 ; P1.2 2621.27,801 3019.01,801 R3.2 ; C5.2 3156,1178 3223,1111 3450,1111 3511,1050 3511,976 3483,948 C1.2 3428,946 C2.2 ; C5.2@3139.27,1179.73 3202,1242.46 3202,1311 3092,1421 C8.2 3094,1457.8 C10.2 3607.06,1457.8 C14.2 3903.97,1146.97 3840,1083 3758,1083 3733.5,1058.5 C16.2 3733.5,974.5 3772,936 D2.A@3772,867 ; v2(3656,1709) 3656,1730.5 C15.2 3744.5,1775.5 3783,1737 D1.A
Net24V_C: 24V.C R4.1 | length 99
  Top Layer w15: 24V.C R4.1@3649.02,1932.48
Net48V_C: 48V.C R8.1 | length 99
  Top Layer w15: 48V.C R8.1@3649.02,188.52
NetC1_1: C1.1 R1.2 U3.1 | length 382.7
  Bottom Layer w15: 3176,1058.99 3416.01,1058.99 3430,1045 C1.1
  Bottom Layer w40: R1.2 3176,1058.99 ; 3176,1033 3176,1054
NetC2_1: C2.1 U3.2 | length 169
  Bottom Layer w10: U3.2 3331.32,999.32 C2.1
NetC3_1: C3.1 C4.1 U3.4 | length 303.3
  Bottom Layer w10: U3.4 3239.06,959.95 3260,939 3260,906.99 C3.1 3329,849.99 C4.1
NetC3_2: C3.2 R2.2 R3.1 R5.1 U3.5 | length 672.2
  Bottom Layer w10: U3.5 3176,895 R3.1 3172,781 C3.2 3270,728 3270,659 3287.5,641.5 R2.2 3391.5,708 R5.1
NetC4_2: C4.2 R2.1 | length 129.1
  Bottom Layer w10: R2.1@3318,711.5 R2.1 3327.5,704.5 C4.2
NetC5_1: C5.1 R1.1 R6.2 U3.10 | length 233.3
  Bottom Layer w40: 3014,1033.22 3014,1056 3034,1076 R1.1 3064.01,1107.99 R6.2@3064.01,1245
NetC7_1: C7.1 U3.9 | length 204
  Bottom Layer w10: C7.1 2939,1083.5 2939,1016 2955.69,999.32 U3.9
NetC9_1: C9.1 R10.2 U3.7 | length 370.6
  Bottom Layer w10: C9.1 2896.5,905 2949,905 2958,914 2958,946 2971.94,959.95 U3.7
  Bottom Layer w15: R10.2@2698.5,864 C9.1
NetC15_1: C15.1 F1.2 J2.12 J2.13 | length 999.3
  Bottom Layer w40: C15.1@3812,1818 F1.2@3971.67,1818 ; F1.2@3979,1811.67 4220.33,1811.67 4395,1637 4395,1521 J2.12 4526,1440 J2.13
NetC16_1: C16.1 F2.2 J4.12 J4.13 | length 1014.8
  Bottom Layer w40: C16.1 F2.2@3971.67,1018 ; F2.2 4220.33,1011.67 4395,837 4395,721 J4.12 4526,640 J4.13
NetC17_T1_1: C17_T1.1 F3_T1.1 T1_T1.24 | length 456.8
  Top Layer w25: T1_T1.24 v1(1299,1959)
  Bottom Layer w25: F3_T1.1@1299,1776 v1(1299,1959) ; F3_T1.1@1300,1775 C17_T1.1
NetC17_T2_1: C17_T2.1 F3_T2.1 T1_T2.24 | length 458
  Top Layer w25: T1_T2.24 v1(1299,958.21)
  Bottom Layer w25: F3_T2.1@1299,774 v1(1299,958.21) ; F3_T2.1@1301,772 C17_T2.1
NetC20_1: C20.1 U1.3 U1.12 U1.13 U1.14 | length 397
  Bottom Layer w15: U1.14 U1.13 U1.12 U1.3 C20.1@2053.5,1645
NetC22_1: C22.1 U2.3 U2.12 U2.13 U2.14 | length 397
  Bottom Layer w15: U2.14 U2.13 U2.12 U2.3 C22.1@2054.5,642
NetD5_A: D5.A L1.1 Q1.5 Q1.6 Q1.7 Q1.8 | length 1004.4
  Top Layer w40: v2(2581,1382) L1.1@2696,1497
  Bottom Layer w40: D5.A 2313.72,1068 Q1.5 Q1.6 Q1.7 Q1.8 2354.72,1319.72 2417,1382 v2(2581,1382)
"NetPort 3 Status_C": "Port 3 Status.C" R12.2 | length 178.7
  Top Layer w15: v1(2184,1766) 2184,1867.52
  Bottom Layer w15: R12.2 2163,1745 v1(2184,1766)
"NetPort 4 Status_C": "Port 4 Status.C" R13.2 | length 539
  Top Layer w15: 2184,253.48 v1(2184,328)
  Bottom Layer w15: R13.2 2155,742 2184,713 v1(2184,328)
NetQ1_1: Q1.1 Q1.2 Q1.3 R10.1 R11.1 | length 849.1
  Bottom Layer w15: Q1.3 2491,1159 2460,1128 2460,1072 2511,1021 2603.5,1021 R10.1
  Bottom Layer w40: Q1.3@2569.28,1169 Q1.1 R11.1@2852,1259
NetQ1_4: Q1.4 R7.1 | length 351.7
  Bottom Layer w15: Q1.4 2646,1109 2804,951 R7.1
NetR5_2: R5.2 R9.1 | length 82.7
  Bottom Layer w10: R9.1 3406,568 R5.2
NetR7_2: R7.2 U3.8 | length 104
  Bottom Layer w10: R7.2 2947.13,979.63 U3.8
NetR12_1: R12.1 U1.1 | length 91
  Bottom Layer w15: U1.1 R12.1
NetR13_1: R13.1 U2.1 | length 91
  Bottom Layer w15: U2.1 R13.1
O1_N: J1.10 J2.10 | length 5951.9
  Top Layer w15: J1.10 651,1590 627,1566 627,1315 725,1217 921,1217 957,1181 1087,1181 1132,1136 1583.82,1136 1600.5,1152.68 1600.5,1154.68 1631.82,1186 1674.18,1186 1705.5,1154.68 1705.5,1152.68 1722.18,1136 1743.82,1136 1760.5,1152.68 1760.5,1154.68 1791.82,1186 1834.18,1186 1865.5,1154.68 1865.5,1152.68 1882.18,1136 1903.82,1136 1920.5,1152.68 1920.5,1154.68 1951.82,1186 1994.18,1186 2025.5,1154.68 2025.5,1123.97 2042.18,1107.29 2063.82,1107.29 2080.5,1123.97 2080.5,1148.68 2111.82,1180 2154.18,1180 2185.5,1148.68 2185.5,1102.68 2202.18,1086 2223.82,1086 2240.5,1102.68 2240.5,1148.68 2271.82,1180 2314.18,1180 2345.5,1148.68 2345.5,1102.68 2362.18,1086 2383.82,1086 2400.5,1102.68 2400.5,1148.68 2431.82,1180 2474.18,1180 2505.5,1148.68 2505.5,1102.68 2522.18,1086 2543.82,1086 2560.5,1102.68 2560.5,1148.68 2591.82,1180 2634.18,1180 2665.5,1148.68 2665.5,1102.68 2682.18,1086 2703.82,1086 2720.5,1102.68 2720.5,1148.68 2751.82,1180 2794.18,1180 2825.5,1148.68 2825.5,1102.68 2842.18,1086 2863.82,1086 2880.5,1102.68 2880.5,1148.68 2911.82,1180 2954.18,1180 2985.5,1148.68 2985.5,1102.68 3002.18,1086 3023.82,1086 3040.5,1102.68 3040.5,1148.68 3071.82,1180 3114.18,1180 3145.5,1148.68 3145.5,1102.68 3162.18,1086 3183.82,1086 3200.5,1102.68 3200.5,1148.68 3231.82,1180 3274.18,1180 3305.5,1148.68 3305.5,1102.68 3322.18,1086 3343.82,1086 3360.5,1102.68 3360.5,1148.68 3391.82,1180 3434.18,1180 3465.5,1148.68 3465.5,1102.68 3482.18,1086 3503.82,1086 3520.5,1102.68 3520.5,1148.68 3551.82,1180 3594.18,1180 3638.18,1136 3697.36,1136 3763.36,1070 3972.82,1070 3989.5,1086.68 ; 3989.5,1087.57 4020.82,1118.89 4063.18,1118.89 4094.5,1087.57 ; 4094.5,1086.68 4111.18,1070 4264,1070 4477.5,1283.5 J2.10@4477.5,1338.5
O1_P: J1.9 J2.9 | length 5993.2
  Top Layer w15: J1.9@665.64,1640 602,1576.36 602,1304.64 714.64,1192 910.64,1192 946.64,1156 1076.64,1156 1121.64,1111 1594.18,1111 1625.5,1142.32 1625.5,1144.32 1642.18,1161 1663.82,1161 1680.5,1144.32 1680.5,1142.32 1711.82,1111 1754.18,1111 1785.5,1142.32 1785.5,1144.32 1802.18,1161 1823.82,1161 1840.5,1144.32 1840.5,1142.32 1871.82,1111 1914.18,1111 1945.5,1142.32 1945.5,1144.32 1962.18,1161 1983.82,1161 2000.5,1144.32 2000.5,1113.61 2031.82,1082.29 2074.18,1082.29 2105.5,1113.61 2105.5,1138.32 2122.18,1155 2143.82,1155 2160.5,1138.32 2160.5,1092.32 2191.82,1061 2234.18,1061 2265.5,1092.32 2265.5,1138.32 2282.18,1155 2303.82,1155 2320.5,1138.32 2320.5,1092.32 2351.82,1061 2394.18,1061 2425.5,1092.32 2425.5,1138.32 2442.18,1155 2463.82,1155 2480.5,1138.32 2480.5,1092.32 2511.82,1061 2554.18,1061 2585.5,1092.32 2585.5,1138.32 2602.18,1155 2623.82,1155 2640.5,1138.32 2640.5,1092.32 2671.82,1061 2714.18,1061 2745.5,1092.32 2745.5,1138.32 2762.18,1155 2783.82,1155 2800.5,1138.32 2800.5,1092.32 2831.82,1061 2874.18,1061 2905.5,1092.32 2905.5,1138.32 2922.18,1155 2943.82,1155 2960.5,1138.32 2960.5,1092.32 2991.82,1061 3034.18,1061 3065.5,1092.32 3065.5,1138.32 3082.18,1155 3103.82,1155 3120.5,1138.32 3120.5,1092.32 3151.82,1061 3194.18,1061 3225.5,1092.32 3225.5,1138.32 3242.18,1155 3263.82,1155 3280.5,1138.32 3280.5,1092.32 3311.82,1061 3354.18,1061 3385.5,1092.32 3385.5,1138.32 3402.18,1155 3423.82,1155 3440.5,1138.32 3440.5,1092.32 3471.82,1061 3514.18,1061 3545.5,1092.32 3545.5,1138.32 3562.18,1155 3583.82,1155 3627.82,1111 3687,1111 3753,1045 3983.18,1045 4014.5,1076.32 ; 4014.5,1077.21 4031.18,1093.89 4052.82,1093.89 4069.5,1077.21 ; 4069.5,1076.32 4100.82,1045 4274.36,1045 4291.36,1062 4519.36,1290 J2.9
O2_N: J3.10 J4.10 | length 6065.7
  Top Layer w15: J3.10 651,790 623,762 623,503.36 883.68,242.68 893.4,232.96 912.85,232.95 921,241.11 940.44,241.11 959.89,221.66 959.89,202.21 951.74,194.06 951.74,174.62 985.68,140.68 990.36,136 2264.82,136 2275.5,146.68 2275.5,230.68 2300.82,256 2365.18,256 2390.5,230.68 2390.5,146.68 2401.18,136 2444.82,136 2455.5,146.68 2455.5,230.68 2480.82,256 2545.18,256 2570.5,230.68 2570.5,146.68 2581.18,136 2624.82,136 2635.5,146.68 2635.5,230.68 2660.82,256 2725.18,256 2750.5,230.68 2750.5,146.68 2761.18,136 2804.82,136 2815.5,146.68 2815.5,230.68 2840.82,256 2905.18,256 2930.5,230.68 2930.5,146.68 2941.18,136 2984.82,136 2995.5,146.68 2995.5,230.68 3020.82,256 3085.18,256 3110.5,230.68 3110.5,146.68 3121.18,136 3164.82,136 3175.5,146.68 3175.5,230.68 3200.82,256 3265.18,256 3290.5,230.68 3290.5,146.68 3301.18,136 3344.82,136 3355.5,146.68 3355.5,230.68 3380.82,256 3445.18,256 3470.5,230.68 3470.5,136 4132,136 4476,480 J4.10
O2_P: J3.9 J4.9 | length 6062.4
  Top Layer w15: J3.9@665.64,840 598,772.36 598,493 980,111 2275.18,111 2300.5,136.32 2300.5,220.32 2311.18,231 2354.82,231 2365.5,220.32 2365.5,136.32 2390.82,111 2455.18,111 2480.5,136.32 2480.5,220.32 2491.18,231 2534.82,231 2545.5,220.32 2545.5,136.32 2570.82,111 2635.18,111 2660.5,136.32 2660.5,220.32 2671.18,231 2714.82,231 2725.5,220.32 2725.5,136.32 2750.82,111 2815.18,111 2840.5,136.32 2840.5,220.32 2851.18,231 2894.82,231 2905.5,220.32 2905.5,136.32 2930.82,111 2995.18,111 3020.5,136.32 3020.5,220.32 3031.18,231 3074.82,231 3085.5,220.32 3085.5,136.32 3110.82,111 3175.18,111 3200.5,136.32 3200.5,220.32 3211.18,231 3254.82,231 3265.5,220.32 3265.5,136.32 3290.82,111 3355.18,111 3380.5,136.32 3380.5,220.32 3391.18,231 3434.82,231 3445.5,220.32 3445.5,120.32 3454.82,111 4142.36,111 4493.68,462.32 4521.36,490 J4.9
O_IN_T1_N: J1.2 T1_T1.3 | length 1204.4
  Top Layer w15: J1.2@933.84,1339 J1.2@934.84,1339 ; J1.2 J1.2@934.84,1339 ; T1_T1.3 1399,1301.83 1386.5,1314.33 1386.5,1319.14 1412,1344.64 1412,1377 1389,1400 1356.64,1400 1295.64,1339 1282.84,1339 1282.84,1476.51 1275.52,1483.83 1210.16,1483.83 1202.84,1476.51 1202.84,1262.8 1172.84,1262.8 1172.84,1397.51 1165.52,1404.83 1100.16,1404.83 1092.84,1397.51 1092.84,1339 J1.2@934.84,1339
O_IN_T1_P: J1.1 T1_T1.2 | length 1071.5
  Top Layer w15: J1.1 1057.84,1314 1110.52,1314 1117.84,1321.32 1117.84,1379.83 1147.84,1379.83 1147.84,1245.12 1155.16,1237.8 1220.52,1237.8 1227.84,1245.12 1227.84,1458.83 1257.84,1458.83 1257.84,1321.32 1265.16,1314 1306,1314 1367,1375 1378.64,1375 1387,1366.64 1387,1355 1361.5,1329.5 1361.5,1314.33 1349,1301.83 T1_T1.2
O_IN_T2_N: J3.2 T1_T2.3 | length 1215.7
  Top Layer w15: J3.2 934.84,539 1110.36,539 1161,488.36 1161,319.36 1180.68,299.68 1210.68,299.68 1230,319 1230,565.36 1256.64,592 1320.36,592 1386.5,525.86 1386.5,314.33 1399,301.83 T1_T2.3@1399,259.29
O_IN_T2_P: J3.1 T1_T2.2 | length 1214.6
  Top Layer w15: J3.1 1057.84,514 1100,514 1136,478 1136,463 1136,443.5 1125.5,433 1101.5,433 1091,422.5 1091,413.5 1101.5,403 1125.5,403 1136,392.5 1136,383.5 1125.5,373 1101.5,373 1091,362.5 1091,353.5 1101.5,343 1125.5,343 1136,332.5 1136,313 1136,309 1163,282 1170.32,274.68 1221.03,274.68 1228.36,282 1247.68,301.32 1255,308.64 1255,555 1267,567 1310,567 1361.5,515.5 1361.5,314.33 1349,301.83 T1_T2.2@1349,259.29
O_OUT_T1_N: J2.2 T1_T1.22 | length 3659
  Top Layer w15: T1_T1.22 1399,1913.25 1386.5,1925.75 1386.5,1933 1467.5,2014 2193.64,2014 2308.64,1899 2446.68,1899 2514.68,1967 2531.32,1967 2555.5,1942.82 2555.5,1869.82 2594.32,1831 2631.68,1831 2670.5,1869.82 2670.5,1942.82 2694.68,1967 2711.32,1967 2735.5,1942.82 2735.5,1869.82 2774.32,1831 2811.68,1831 2850.5,1869.82 2850.5,1942.82 2874.68,1967 2891.32,1967 2959.32,1899 3097,1899 3406,1590 J2.2
O_OUT_T1_P: J2.1 T1_T1.23 | length 3659
  Top Layer w15: T1_T1.23 1349,1913.25 1361.5,1925.75 1361.5,1943.36 1374.57,1956.43 1379.35,1961.2 1379.35,1983.47 1371.52,1991.3 1371.52,2013.57 1381.07,2023.12 1403.34,2023.12 1411.16,2015.29 1433.44,2015.29 1457.07,2038.93 1457.14,2039 2204,2039 2319,1924 2436.32,1924 2465.5,1953.18 2504.32,1992 2541.68,1992 2580.5,1953.18 2580.5,1880.18 2604.68,1856 2621.32,1856 2645.5,1880.18 2645.5,1953.18 2684.32,1992 2721.68,1992 2760.5,1953.18 2760.5,1880.18 2784.68,1856 2801.32,1856 2825.5,1880.18 2825.5,1953.18 2864.32,1992 2901.68,1992 2940.5,1953.18 2969.68,1924 3107.36,1924 3416.36,1615 4191.16,1615 J2.1
O_OUT_T2_N: J4.2 T1_T2.22 | length 3592.8
  Top Layer w15: T1_T2.22@1399,870.71 1399,913.25 1386.5,925.75 1386.5,951.5 1449,1014 1920.64,1014 2142.64,792 2932.68,792 2985.68,845 3002.32,845 3026.5,820.82 3026.5,777.82 3065.32,739 3102.68,739 3141.5,777.82 3141.5,820.82 3165.68,845 3182.32,845 3206.5,820.82 3206.5,777.82 3245.32,739 3282.68,739 3321.5,777.82 3321.5,820.82 3345.68,845 3362.32,845 3386.5,820.82 3386.5,777.82 3425.32,739 3462.68,739 3501.5,777.82 3501.5,820.82 3525.68,845 3542.32,845 3595.32,792 4314.16,792 J4.2
O_OUT_T2_P: J4.1 T1_T2.23 | length 3592
  Top Layer w15: T1_T2.23@1349,870.71 1349,913.25 1361.5,925.75 1361.5,961.86 1438.64,1039 1931,1039 2045.5,924.5 2059.29,910.71 2077.67,910.71 2087.42,920.46 2105.81,920.46 2133.39,892.88 2133.39,874.5 2123.64,864.75 2123.64,846.36 2142.5,827.5 2153,817 2922.32,817 2975.32,870 3012.68,870 3051.5,831.18 3051.5,788.18 3075.68,764 3092.32,764 3116.5,788.18 3116.5,831.18 3155.32,870 3192.68,870 3231.5,831.18 3231.5,788.18 3255.68,764 3272.32,764 3296.5,788.18 3296.5,831.18 3335.32,870 3372.68,870 3411.5,831.18 3411.5,788.18 3435.68,764 3452.32,764 3476.5,788.18 3476.5,831.18 3515.32,870 3552.68,870 3605.68,817 4193.16,817 J4.1
OUTA: C17_T1.2 D3_T1.A T1_T1.21 U1.9 U1.10 | length 851.7
  Top Layer w25: T1_T1.21 1449,1929.79 1478.21,1959 v1(1550,1959)
  Bottom Layer w25: v1@1548.5,1957.5 C17_T1.2 1548.5,1725.5 1509,1686 D3_T1.A 1583,1625 1663,1545 U1.10 U1.9
OUTA_T2: C17_T2.2 D3_T2.A T1_T2.21 U2.9 U2.10 | length 854.9
  Top Layer w25: T1_T2.21 1449,929 1478.21,958.21 v1(1550,958.21)
  Bottom Layer w25: C17_T2.2 1549.5,722.5 1510,683 D3_T2.A 1584,622 1664,542 U2.10 U2.9 ; C17_T2.2@1550,772.5 v1(1550,958.21)
pads on no net: J1. J1.12 J1.13 J1.15 J1.16 J2. J3. J3.12 J3.13 J3.15 J3.16 J4. T1_T1.1 T1_T1.4 T1_T1.7 T1_T1.10 T1_T1.15 T1_T1.18 T1_T2.1 T1_T2.4 T1_T2.7 T1_T2.10 T1_T2.15 T1_T2.18 U1.8 U2.8 U3.3 U3.11
copper on no net:
  other v3: 125,150 5125,150 125,1950 5125,1950

## Polygon pours and split planes (outlines as drawn)
24V on GND Plane (split plane): 5229.9,20.1 20.1,20.1 20.1,2079.9 5229.9,2079.9
GND on 24V Plane (split plane): 5229.9,20.1 20.1,20.1 20.1,2079.9 5229.9,2079.9

## Keep-outs
Keep-Out Layer:
  the board outline again, w10

## Silkscreen, mask and mechanical layers (free items; w line width, h text height)
Top Overlay:
  text "POE Injector / R1 - 2017" at 2846,935 h60
Bottom Overlay:
  text "Designed By:" at 3140,417 h60
  text "David Zobel    Brit Chesley" at 3542,256 h60

## Dimensions
0,0 to 125,150 on Mechanical 15
5125,150 to 0,0 on Mechanical 15
0,0 to 5250,0 on Mechanical 15
0,0 to 125,150 on Mechanical 15
0,0 to 125,1950 on Mechanical 15
0,0 to 0,2100 on Mechanical 15